# Altium PCB PCB1.PcbDoc
Units mil, origin at the board's own origin, x right, y up, seen from the top; angles counter-clockwise.
Board outline 1572 x 1618.02 mil, 2 copper layers (Top Layer, Bottom Layer); 18 components, 11 nets, 49 pads, 6 vias.
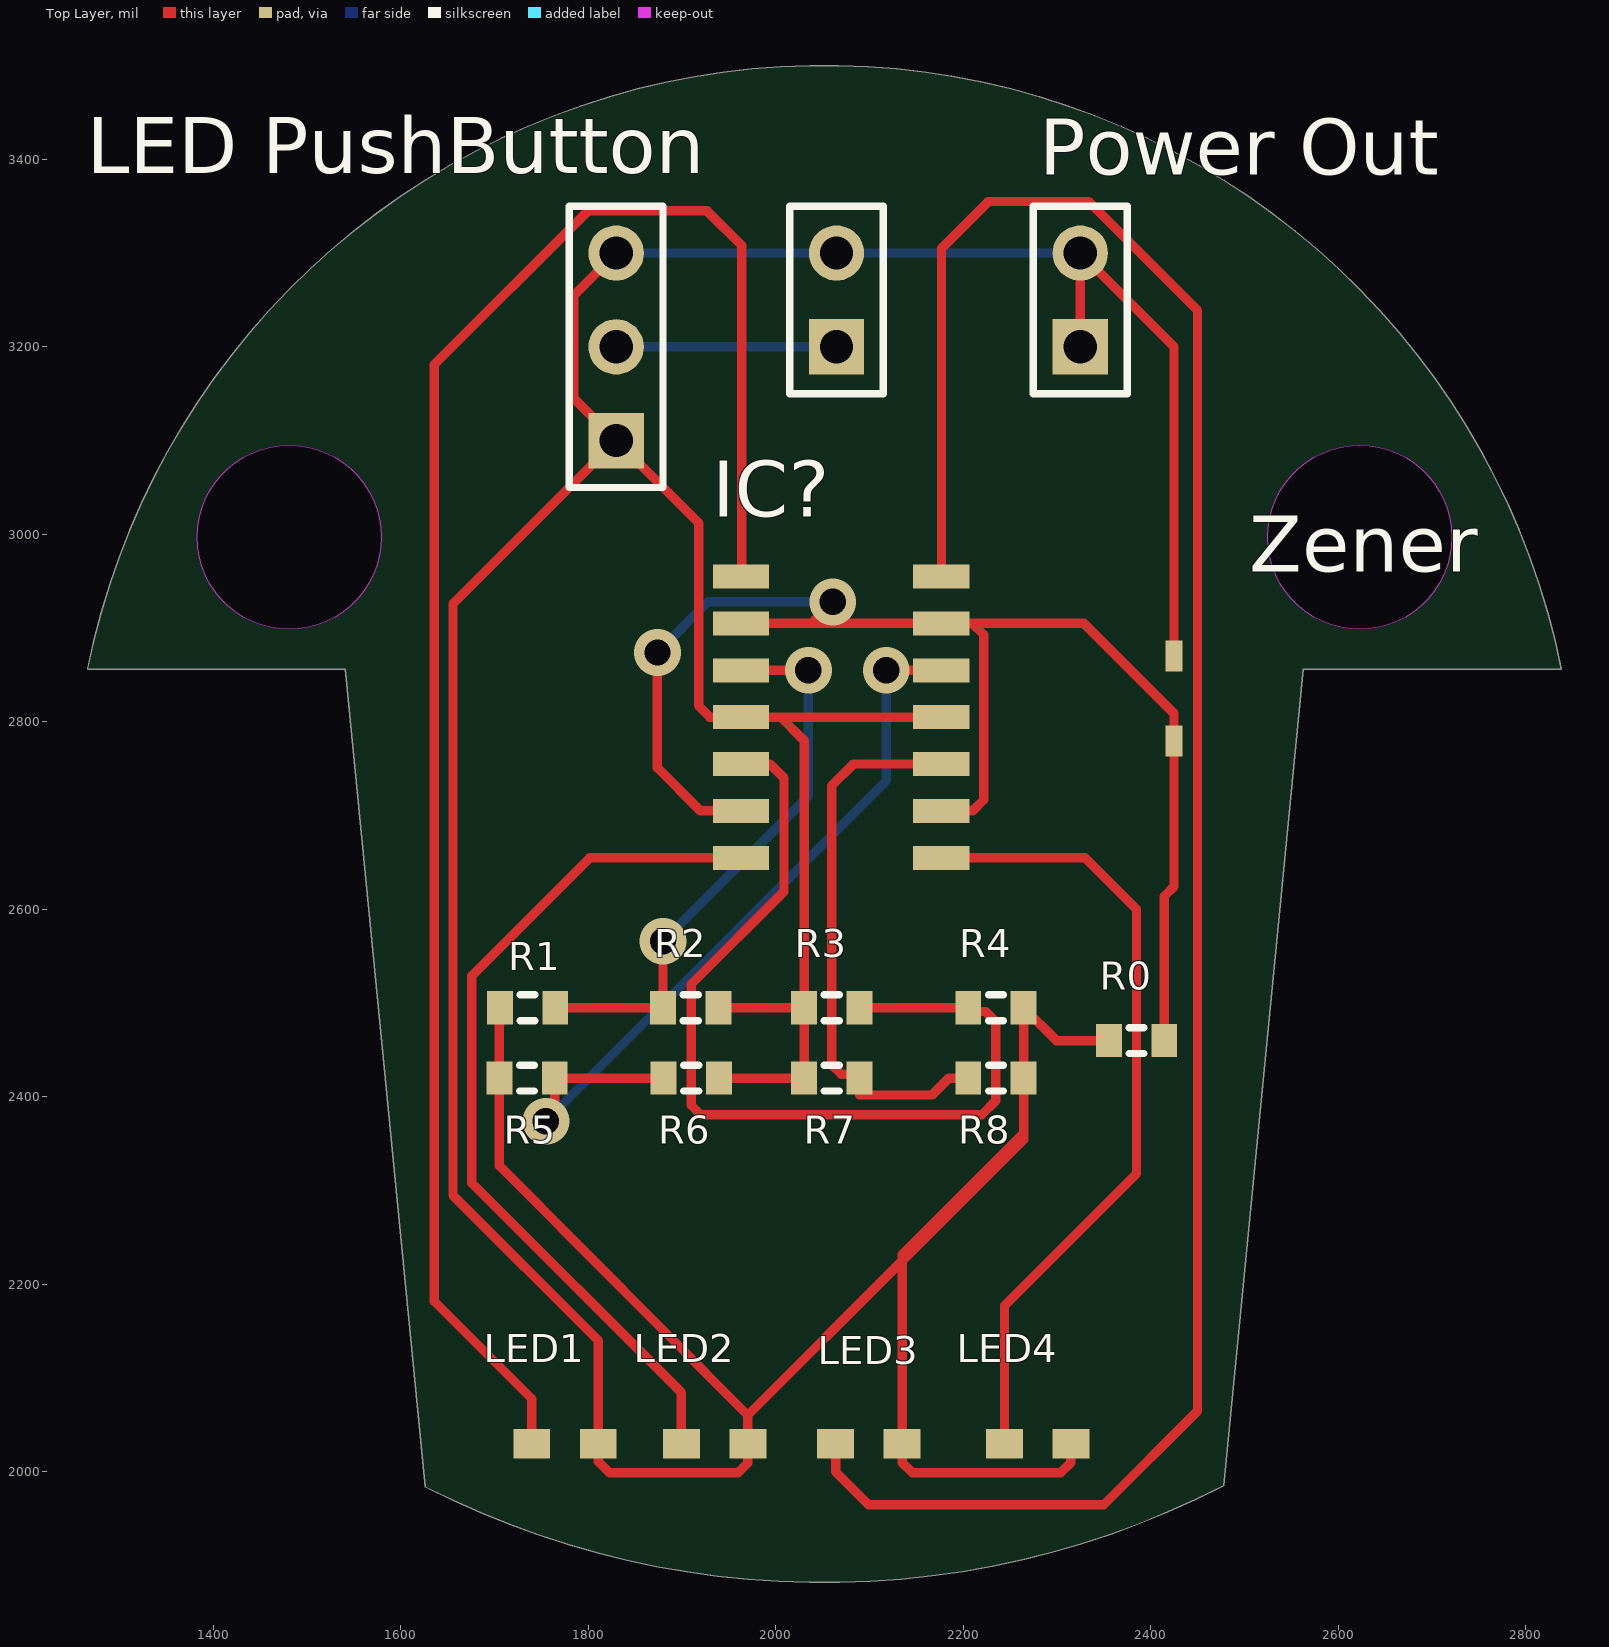
[diagram p0: Top Layer view]
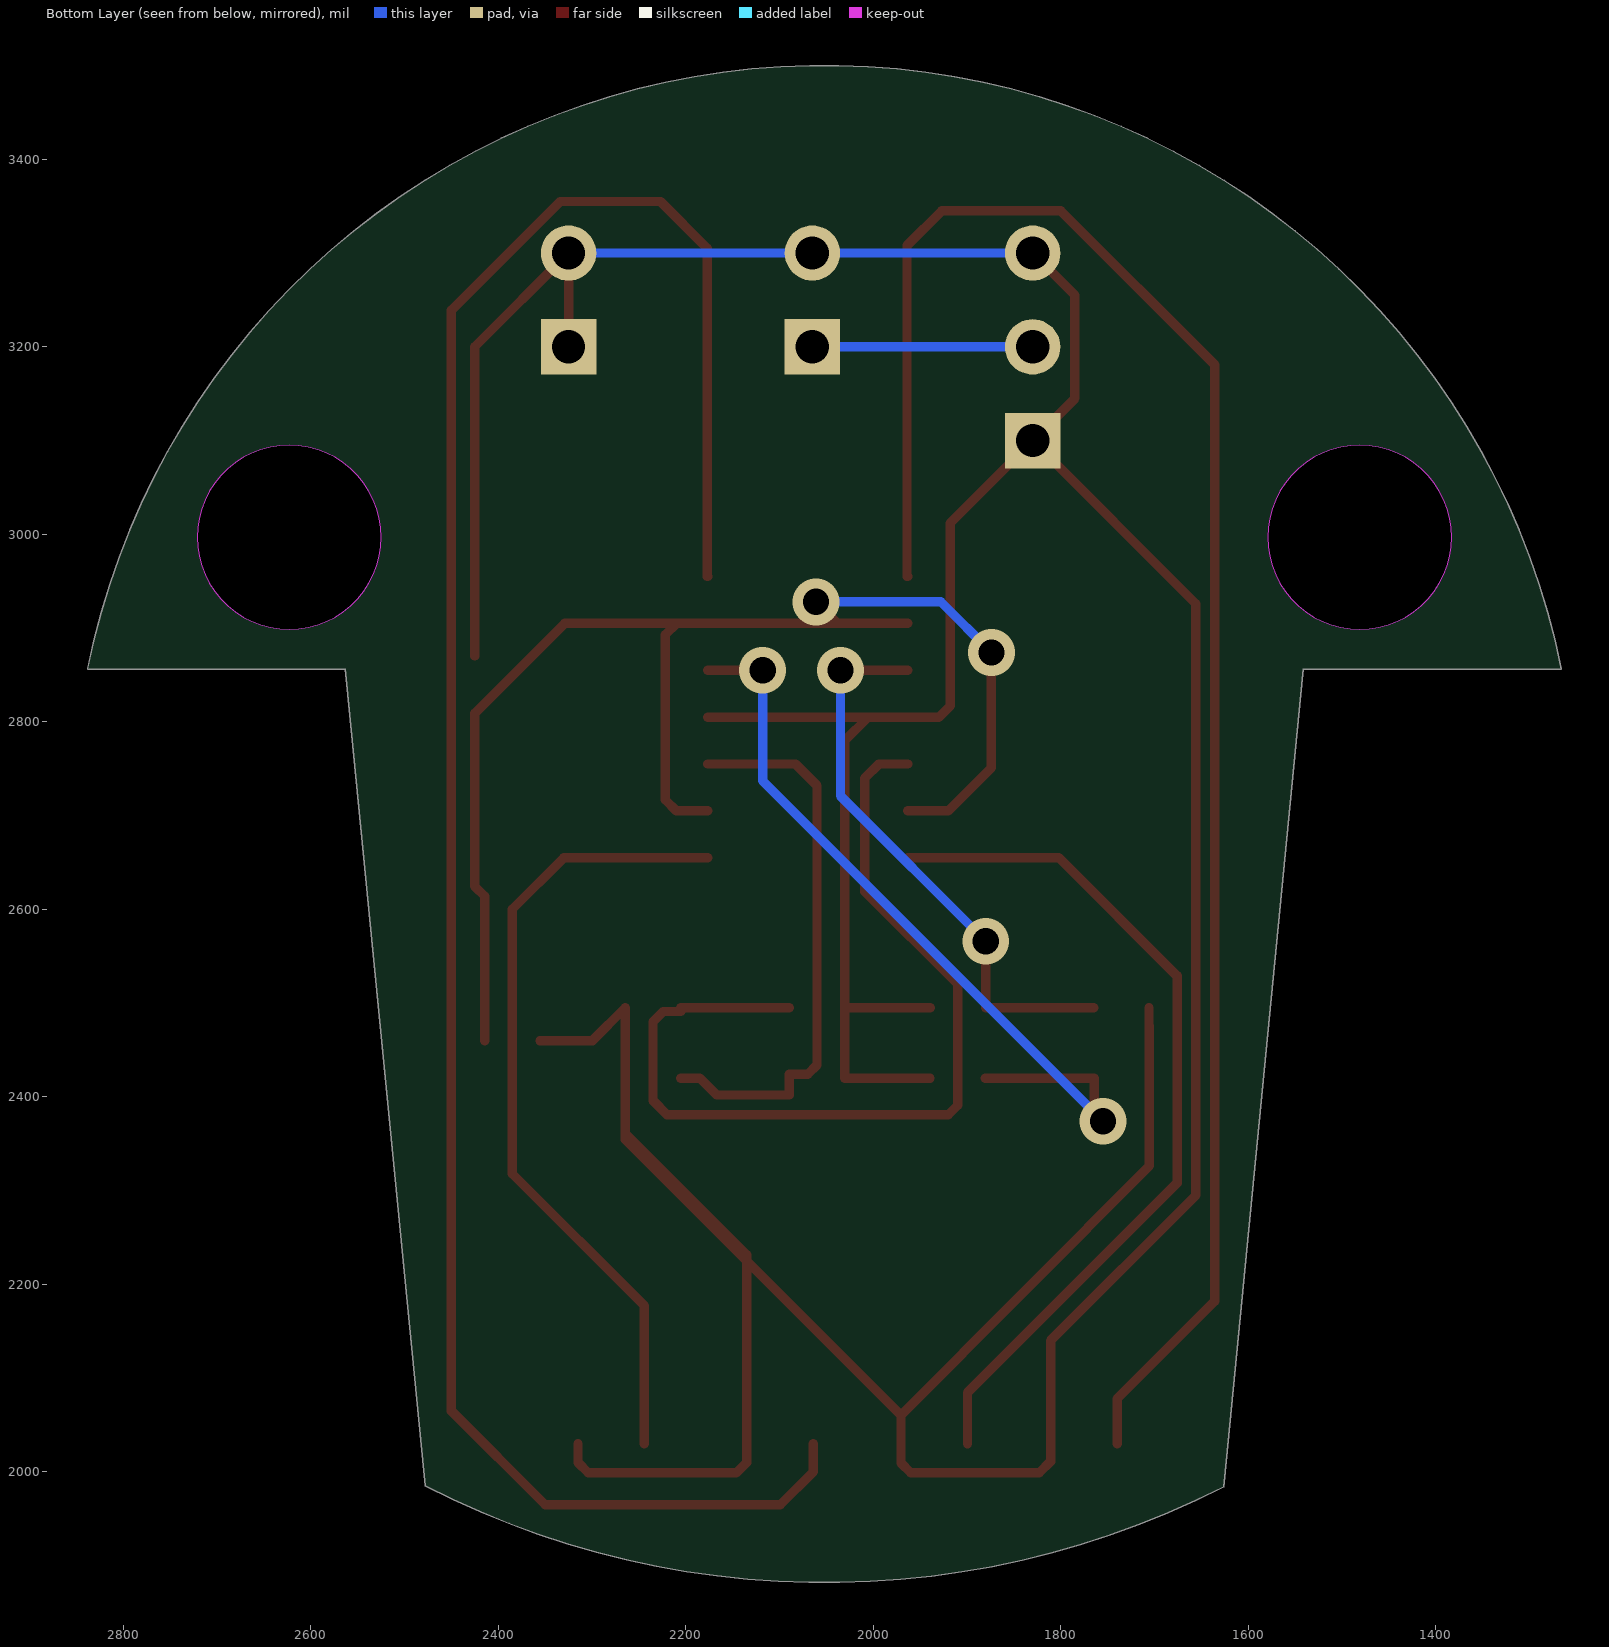
[diagram p1: Bottom Layer view, seen from below]

## Layer stack, top to bottom
Top Solder: solder mask 0.4, Solder Resist, Dk 3.5
Top Layer: signal copper 1.4
Dielectric 1: dielectric 12.6, FR-4, Dk 4.8
Bottom Layer: signal copper 1.4
Bottom Solder: solder mask 0.4, Solder Resist, Dk 3.5

## Board outline
1266.12,2856.33 1541.22,2856.33 1626.34,1983.92 ccw(c2050.95,2816.58) 2478.03,1985.19 2563.02,2856.33 2838.12,2856.33 ccw(c2052.12,2698.5)
cut-out: 1481.21,2898.62 cw(c1481.21,2996.87) 1382.96,2996.87 cw(c1481.21,2996.87) 1481.21,3095.12 cw(c1481.21,2996.87) 1579.46,2996.87 cw(c1481.21,2996.87)
cut-out: 2623.04,2898.62 cw(c2623.04,2996.87) 2524.79,2996.87 cw(c2623.04,2996.87) 2623.04,3095.12 cw(c2623.04,2996.87) 2721.29,2996.87 cw(c2623.04,2996.87)

## Design rules (kind name [scope] priority, off if disabled: settings)
Clearance [All] p1: gap=10 ignorepadtopadclearanceinfootprint=FALSE except(0: Arc-Hole Track-Hole SMDPad-Hole THPad-Hole Via-Hole Fill-Hole Poly-Hole Region-Hole Text-Hole)
PolygonConnect [All] p1: connectstyle=Relief reliefconductorwidth=10 reliefentries=4 polygonreliefangle="90 Angle" airgapwidth=10
RoomDefinition Sheet2 [InComponentClass('Sheet2')] p1: confinementstyle=ConfineIn formatcopy=TRUE lockcomponents=FALSE outline 2710,280 7260,280 7260,705 2710,705
RoutingVias [All] p1: holewidth=28 width=50 viastyle="Through Hole" minholewidth=28 minwidth=50 maxholewidth=28 maxwidth=50
SolderMaskExpansion [All] p1: expansion=4
Width [All] p1: maxlimit=10 minlimit=10 preferedwidth=10
30 further rules are at their usual default settings.

## Classes and differential pairs
component class Sheet2: IC? LED1 LED2 LED3 LED4 "LED PushButton" "Power Out" R0 R1 R2 R3 R4 R5 R6 R7 R8

## Components (designator, comment, footprint, x,y, rotation, side; value= is the part's Value field where it differs from the comment)
IC? "LM324ADR, Quad Operational Amplifier 1.2MHz 5 to 28V, 14-Pin SOIC   Source:  Datasheet" SOIC127P600X175-14N 2070,2805 r0 top
LED1 "1.8X0.6MM RA ORANGE SMD LED   Source:  Datasheet" APDA1806SECK 1775.43,2030 r180 top
LED2 "1.8X0.6MM RA ORANGE SMD LED   Source:  Datasheet" APDA1806SECK 1935,2030 r180 top
LED3 "1.8X0.6MM RA ORANGE SMD LED   Source:  Datasheet" APDA1806SECK 2099.57,2030 r180 top
LED4 "1.8X0.6MM RA ORANGE SMD LED   Source:  Datasheet" APDA1806SECK 2279.57,2030 r180 top
"LED PushButton" "Header 3" HDR1X3 1830,3100 r90 top
"Power Out" "Header 2" HDR1X2 2325,3200 r90 top
R0 "Res3" J1-0603 2385,2460 r0 top value=10K
R1 "Res3" J1-0603 1735.47,2495 r0 top value=10K
R2 "Res3" J1-0603 1909.53,2495 r0 top value=3.6K
R3 "Res3" J1-0603 2060,2495 r0 top value=10K
R4 "Res3" J1-0603 2235,2495 r0 top value=3.3K
R5 "Res3" J1-0603 1735,2420 r0 top value=10K
R6 "Res3" J1-0603 1910,2420 r0 top value=3.1K
R7 "Res3" J1-0603 2060,2420 r0 top value=10K
R8 "Res3" J1-0603 2235,2420 r0 top value=2.8K
Zener "Zener Diodes Diode Zener Single 10V 2% 550mW 2-Pin   Source:  Datasheet" SODFL2512X80N 2425,2825 r90 top
? "Header 2" HDR1X2 2065,3200 r90 top

## Footprints (in the part's own frame and the unit in brackets; to place one, negate y for a bottom-side part, rotate by r counter-clockwise, add the part's x,y. Pads: shape width x height; smd on the part's side, far side on the other; paste and mask are expansions set on the pad)
APDA1806SECK [mil]
  rect 39.37x31.5 smd: 1(-35.43,0) 2(35.43,0)
HDR1X2 [mm] "Connector; Header; 2 Position"
  rect 1.5x1.5 hole 0.9: 1(0,0)
  round 1.5 hole 0.9: 2(2.54,0)
  silkscreen extent -1.27,-1.27 3.81,1.27
HDR1X3 [mm] "Connector; Header; 3 Position"
  rect 1.5x1.5 hole 0.9: 1(0,0)
  round 1.5 hole 0.9: 2(2.54,0) 3(5.08,0)
  silkscreen extent -1.27,-1.27 6.35,1.27
J1-0603 [mm] "Chip Resistor, Body 1.6x0.8mm, IPC High Density"
  rect 0.7x0.9 smd: 1(-0.75,0) 2(0.75,0)
  silkscreen extent -0.2,-0.35 0.2,0.35, body extent -0.85,-0.48 0.85,0.48, height 0.9
SODFL2512X80N [mm]
  rect 0.84x0.46 smd: 1(-1.15,0) 2(1.15,0)
SOIC127P600X175-14N [mm]
  rect 1.525x0.65 smd: 1(-2.712,3.81) 2(-2.712,2.54) 3(-2.712,1.27) 4(-2.712,0) 5(-2.712,-1.27) 6(-2.712,-2.54) 7(-2.712,-3.81) 8(2.712,-3.81) 9(2.712,-2.54) 10(2.712,-1.27) 11(2.712,0) 12(2.712,1.27) 13(2.712,2.54) 14(2.712,3.81)

## Part data
IC?: library part LM324ADR, Manufacturer_Name="Texas Instruments", Arrow_Part_Number=LM324ADR, Arrow_Price-Stock=https://www.arrow.com/en/products/lm324adr/texas-instruments, Height=1.75mm, Manufacturer_Part_Number=LM324ADR, Mouser_Part_Number=595-LM324ADR, Mouser_Price-Stock=https://www.mouser.co.uk/ProductDetail/Texas-Instruments/LM324ADR?qs=j01uVdFEFjGTgJsnyinRPw%3D%3D
LED1 LED2 LED3 LED4: library part APDA1806SECK, Manufacturer_Name=Kingbright, Arrow_Part_Number=APDA1806SECK, Arrow_Price-Stock=https://www.arrow.com/en/products/apda1806seck/kingbright, Height=1.65mm, Manufacturer_Part_Number=APDA1806SECK, Mouser_Part_Number=604-APDA1806SECK, Mouser_Price-Stock=https://www.mouser.co.uk/ProductDetail/Kingbright/APDA1806SECK?qs=%252BEew9%252B0nqrBgEjarIMY07g%3D%3D
"LED PushButton": "Header, 3-Pin", LatestRevisionDate=17-Jul-2002, LatestRevisionNote="Re-released for DXP Platform.", Publisher="Altium Limited"
"Power Out" ?: "Header, 2-Pin", LatestRevisionDate=17-Jul-2002, LatestRevisionNote="Re-released for DXP Platform.", Publisher="Altium Limited"
R0 R1 R2 R3 R4 R5 R6 R7 R8: "Resistor", LatestRevisionDate=29-May-2009, LatestRevisionNote="IPC-7351 Footprint Added.", PackageDescription="Chip Resistor", PackageReference=J1-0603, Published=8-Jun-2000, Publisher="Altium Limited"
Zener: library part BZX84J-B10,115, Manufacturer_Name=Nexperia, Arrow_Part_Number=BZX84J-B10,115, Arrow_Price-Stock=https://www.arrow.com/en/products/bzx84j-b10115/nexperia, Height=0.8mm, Manufacturer_Part_Number=BZX84J-B10,115, Mouser_Part_Number=771-BZX84J-B10,115, Mouser_Price-Stock=https://www.mouser.com/Search/Refine.aspx?Keyword=771-BZX84J-B10%2C115

## Via types
v1: diameter 50, hole 28, Top Layer to Bottom Layer, 6 vias

## Nets (pads, with @x,y where several pads share a name; then routed paths per layer and width w, separated by ;. In a path a pad name is that pad's centre, name@x,y a point inside that pad or via, vN(x,y) a via of type N, cw(c..) or ccw(c..) an arc to the next point about the centre after c; other vN are vias at no path point)
Net_1: "LED PushButton.2" ?.1 | length 235
  Bottom Layer w10: 1830,3200 ?.1
Net_2: "LED PushButton.1" "LED PushButton.3" "Power Out.1" "Power Out.2" ?.2 IC?.4 IC?.11 LED1.1 LED2.1 LED3.1 LED4.1 R0.1 R1.1 R2.2 R3.1 R4.2 R5.1 R6.2 R7.1 R8.2 Zener.2 | length 5729.1
  Top Layer w10: R1.1 1705.94,2476.47 1705.47,2476 R5.1 1705.47,2326.52 1970.43,2060.43 ; 1830,3300 1785,3255 1785,3145 1830,3100 ; R2.2 R3.1 ; R6.2 R7.1 R3.1 ; IC?.11 2005.47,2805 ; LED4.1 2315,2010 2304,1999 2146,1999 2135,2010 LED3.1 2135,2225 ; 2325,3200 2325,3300 2425,3200 Zener.2 ; R0.1 2299.53,2460 R4.2 R8.2 2264.53,2361 ; 1830,3100 1656,2926 1656,2294.86 1810.86,2140 LED1.1 1810.86,2011.14 1823,1999 1960,1999 1970.43,2009.43 LED2.1 1970.43,2060.43 ; 1830,3100 1918,3012 1918,2817 1930,2805 IC?.4 2005.47,2805 ; 1970.43,2060.43 2135,2225 ; 2005.47,2805 2030.47,2780 R3.1 ; 2135,2225 2264.53,2354.53 2264.53,2361 ; 2135,2225 2135,2231.47 2264.53,2361
  Bottom Layer w10: 1830,3300 ?.2 2325,3300
NetIC?_1: IC?.1 LED1.2 | length 1959.1
  Top Layer w10: LED1.2 1740,2078 1636,2182 1636,3181 1800,3345 1927,3345 1964,3308 1964,2955 IC?.1
NetIC?_2: IC?.2 IC?.6 IC?.9 IC?.13 R0.2 Zener.1 | length 1571.2
  Top Layer w10: v1(1874,2874) 1874,2751 1920,2705 IC?.6 ; IC?.2 2038,2905 ; v1(2061,2928) 2038,2905 ; IC?.9 2210,2705 2222,2717 2222,2893 2210,2905 ; R0.2 2414.53,2614 2425,2624.47 Zener.1 2425,2809 2329,2905 2210,2905 ; 2038,2905 IC?.13 2210,2905
  Bottom Layer w10: v1(1874,2874) 1928,2928 v1(2061,2928)
NetIC?_3: IC?.3 R1.2 R2.1 | length 611
  Top Layer w10: R1.2 R2.1 v1(1880,2566) ; IC?.3 v1(2035,2855)
  Bottom Layer w10: v1(1880,2566) 2035,2721 v1(2035,2855)
NetIC?_5: IC?.5 R3.2 R4.1 | length 1015.4
  Top Layer w10: IC?.5 1994,2755 2009,2740 2009,2619 1910,2520 1910,2391 1920,2381 2220,2381 2235,2396 2235,2480 2224,2491 2205.47,2491 R4.1 R3.2
NetIC?_7: IC?.7 LED2.2 | length 931
  Top Layer w10: LED2.2 1899.57,2084.57 1676,2308.14 1676,2529 1802,2655 IC?.7
NetIC?_8: IC?.8 LED4.2 | length 859.4
  Top Layer w10: IC?.8 2330,2655 2385,2600 2385,2318 2244.14,2177.14 LED4.2
NetIC?_10: IC?.10 R7.2 R8.1 | length 603.4
  Top Layer w10: IC?.10 2083,2755 2060,2732 2060,2434 2070,2424 2089.53,2424 R7.2 2089.53,2401.97 2167,2401.97 2185.03,2420 R8.1
NetIC?_12: IC?.12 R5.2 R6.1 | length 856
  Top Layer w10: v1(1755,2374) 1764.53,2383.53 R5.2 R6.1 ; v1(2118,2855) IC?.12
  Bottom Layer w10: v1(1755,2374) 2118,2737 v1(2118,2855)
NetIC?_14: IC?.14 LED3.2 | length 2337.8
  Top Layer w10: LED3.2 2064.14,2000 2099.14,1965 2350,1965 2450,2065 2450,3239 2334,3355 2227,3355 2177,3305 2177,2955 IC?.14

## Silkscreen, mask and mechanical layers (free items; w line width, h text height)
Mechanical 1:
  circle w0.5: c1481.21,2996.87 r98.25
  circle w0.5: c2623.04,2996.87 r98.25
  region: 2563.02,2894.15 2498.14,2884.17 2498.14,2904.14
  region: 1606.11,2884.17 1541.22,2894.15 1606.11,2904.14
  lines w0.5: 1382.96,2996.87 1481.21,2996.87 ; 1394.31,2951.03 1568.11,3042.72 ; 1481.21,2898.62 1481.21,2996.87 ; 1481.21,3095.12 1481.21,2996.87 ; 1541.22,2875.98 1541.22,2913.8 ; 1579.46,2996.87 1481.21,2996.87 ; 1620,2855 1705.01,1983.67 ; 1620.2,2856.33 1541.22,2856.33 ; 2395.4,1947.69 2484.05,2856.33 2563.02,2856.33 ; 2524.79,2996.87 2623.04,2996.87 ; 2563.02,2875.98 2563.02,2913.8 ; 2623.04,2898.62 2623.04,2996.87 ; 2623.04,3095.12 2623.04,2996.87 ; 2721.29,2996.87 2623.04,2996.87 ; 1541.22,2856.33 1266.12,2856.33 cw(c2052.12,2698.5) 2838.12,2856.33 2563.02,2856.33 ; 1541.22,2856.33 1626.34,1983.92 ccw(c2050.95,2816.58) 2478.03,1985.19 2563.02,2856.33